# Altium PCB lora.PcbDoc
Units mil, origin at the board's own origin, x right, y up, seen from the top; angles counter-clockwise.
Board outline 1910 x 1940 mil, 2 copper layers (Top Layer, Bottom Layer); 42 components, 31 nets, 141 pads, 4 vias.
Unrouted connection lines stored in the file: 73.
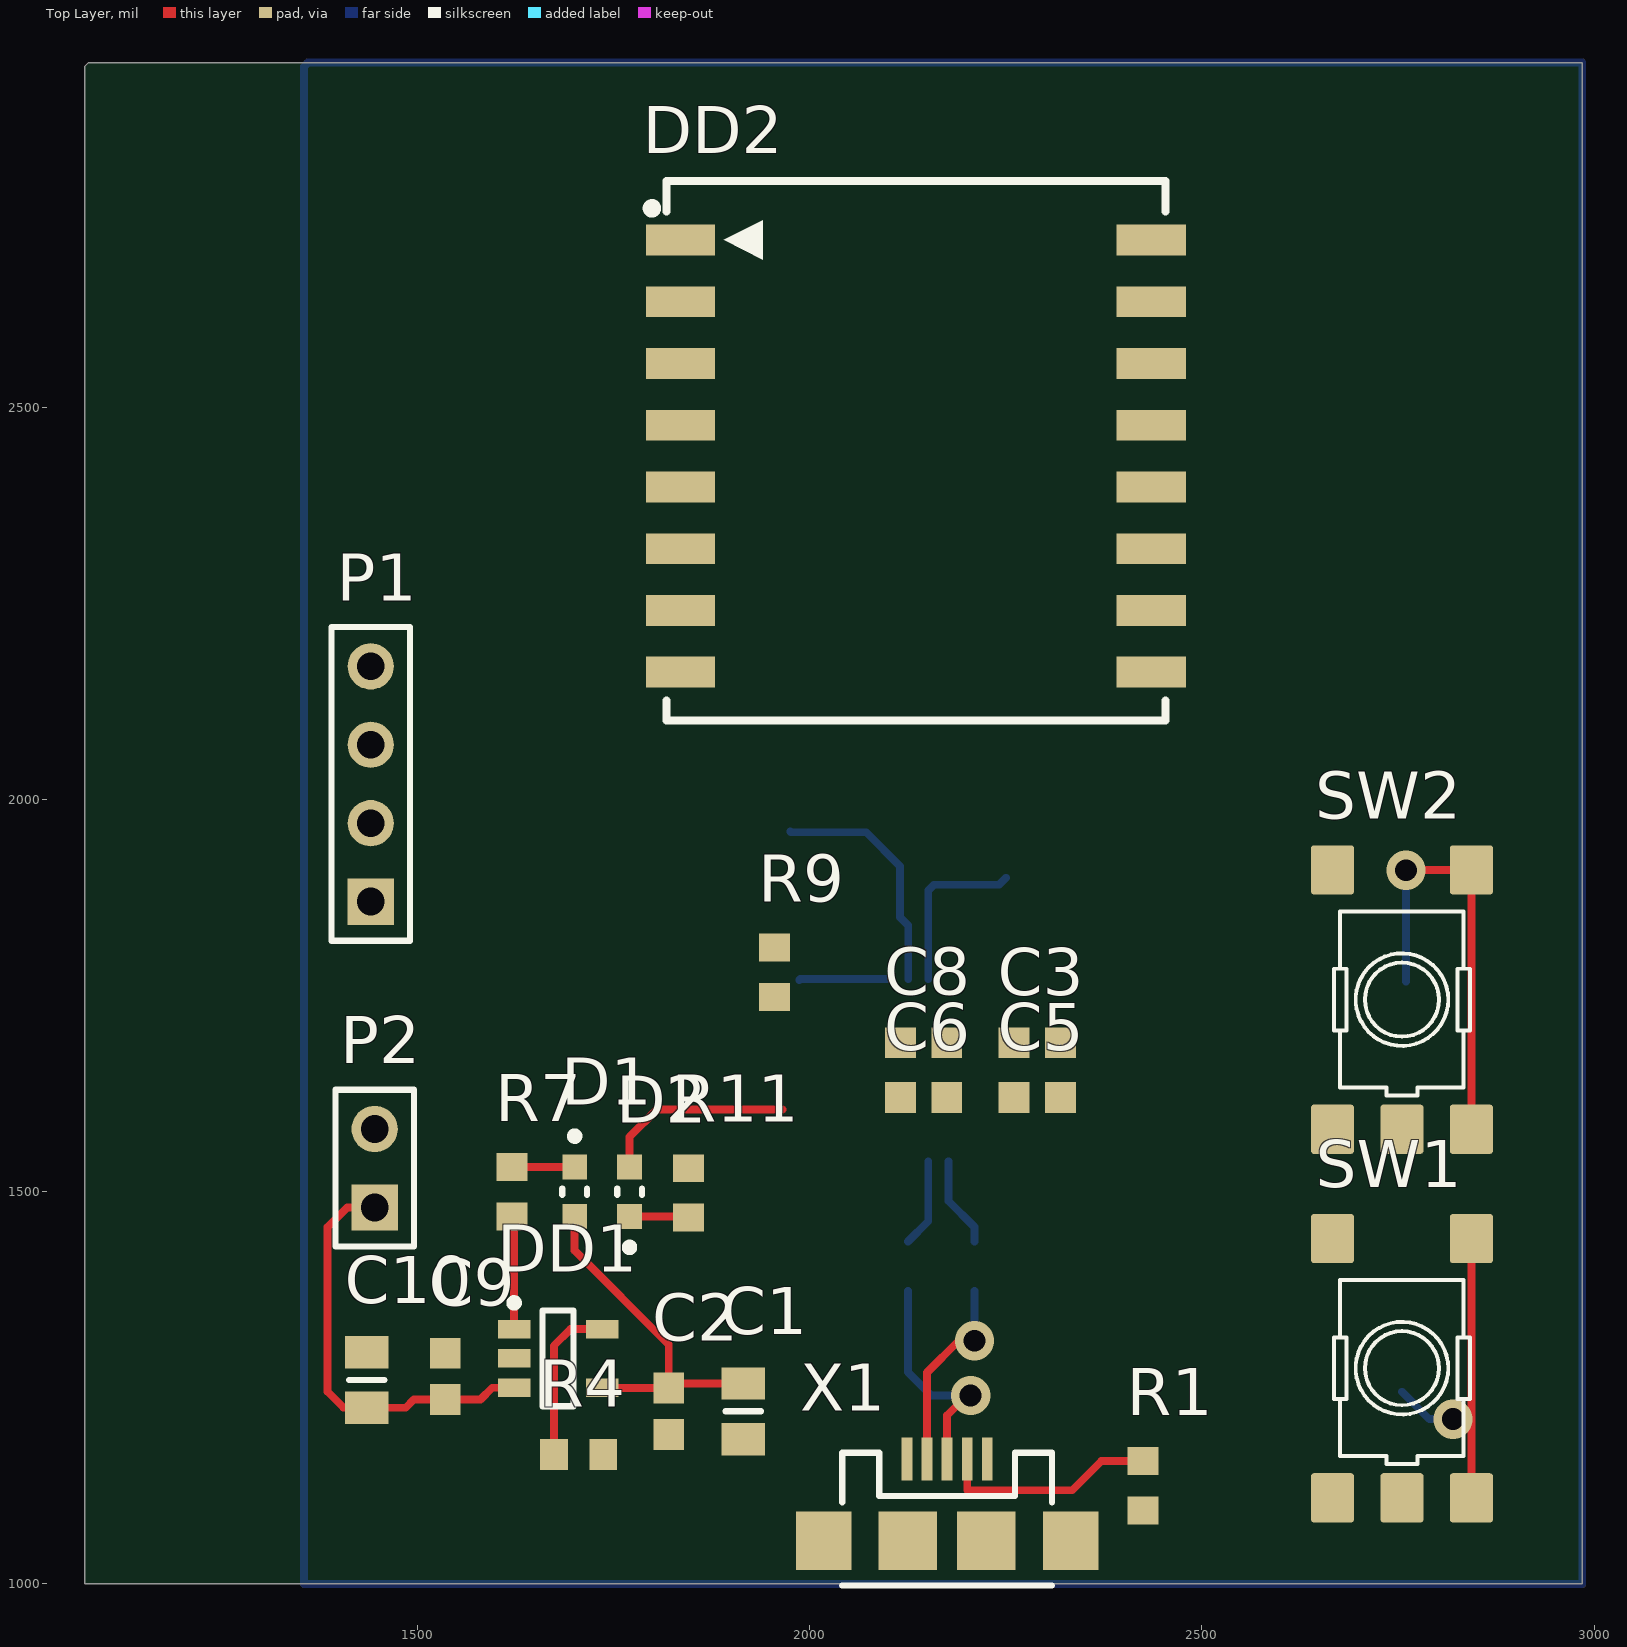
[diagram p0: Top Layer view]
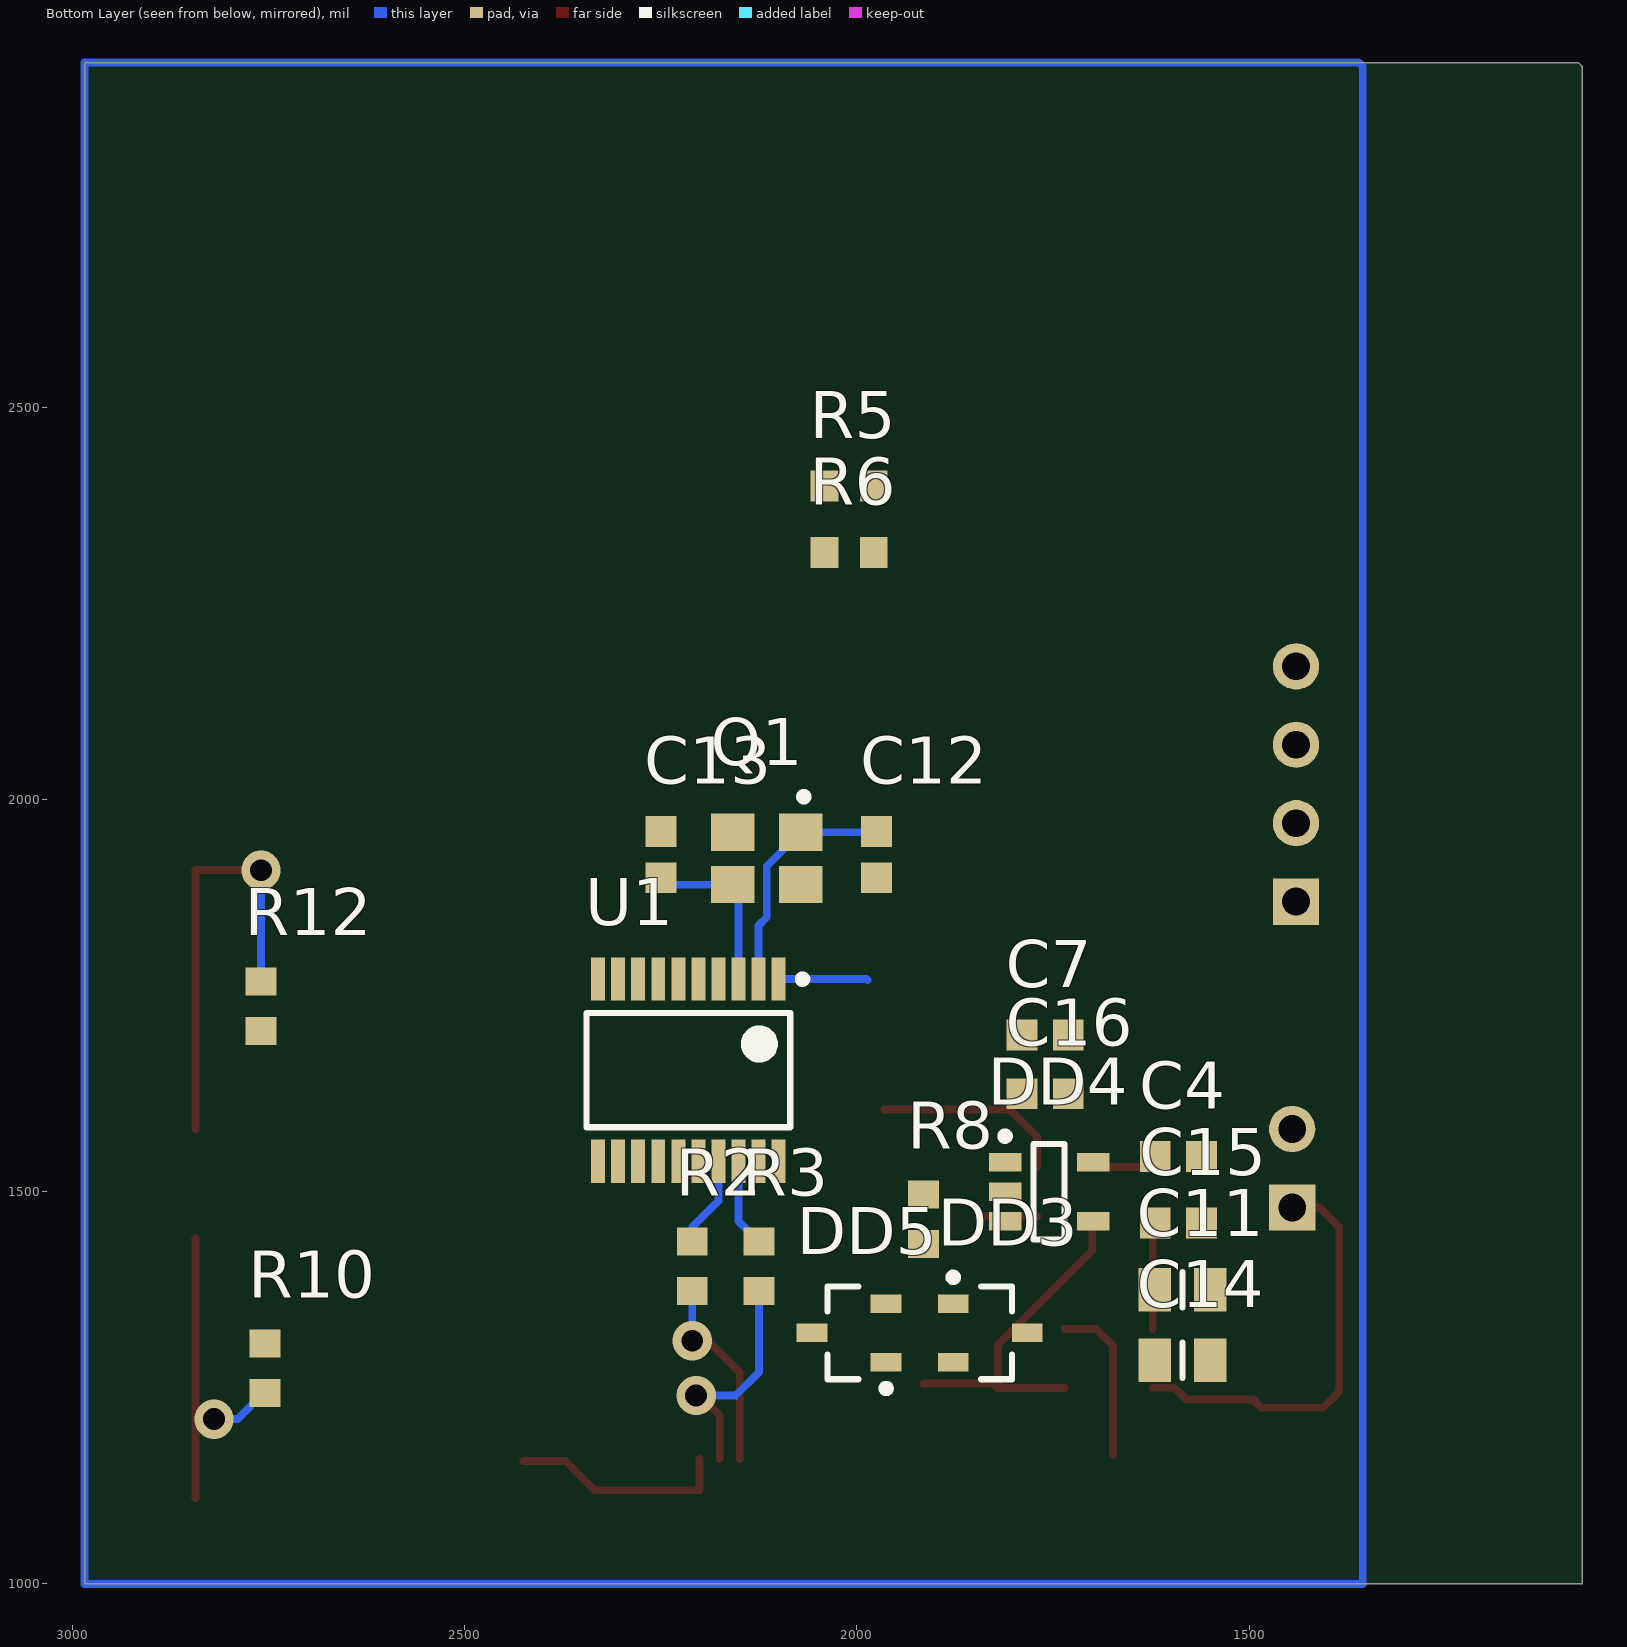
[diagram p1: Bottom Layer view, seen from below]

## Layer stack, top to bottom
Top Solder: solder mask 0.4, Solder Resist, Dk 3.5
Top Layer: signal copper 1.4
Dielectric 1: dielectric 12.6, FR-4, Dk 4.8
Bottom Layer: signal copper 1.4
Bottom Solder: solder mask 0.4, Solder Resist, Dk 3.5

## Board outline
1075,1000 1075,2935 1080,2940 2985,2940 2985,1000

## Design rules (kind name [scope] priority, off if disabled: settings)
Clearance [All] p1: gap=10 ignorepadtopadclearanceinfootprint=FALSE except(0: Arc-Hole Track-Hole SMDPad-Hole THPad-Hole Via-Hole Fill-Hole Poly-Hole Region-Hole Text-Hole; 6: Arc-Arc Arc-Track Arc-SMDPad Arc-THPad Arc-Via Arc-Fill Arc-Poly Arc-Region Arc-Text Track-Track Track-SMDPad Track-THPad Track-Via Track-Fill Track-Poly Track-Region Track-Text)
PolygonConnect [All] p1: connectstyle=Relief reliefconductorwidth=10 reliefentries=4 polygonreliefangle="90 Angle" airgapwidth=10
RoomDefinition stm32-lora [InComponentClass('stm32-lora')] p1: confinementstyle=ConfineIn formatcopy=TRUE lockcomponents=FALSE outline 240,600 9168.9,600 9168.9,5615 240,5615
RoutingVias [All] p1: holewidth=28 width=50 viastyle="Through Hole" minholewidth=28 minwidth=50 maxholewidth=28 maxwidth=50
SolderMaskExpansion [All] p1: expansion=4
Width [All] p1: maxlimit=100 minlimit=6 preferedwidth=10
30 further rules are at their usual default settings.

## Components (designator, comment, footprint, x,y, rotation, side; value= is the part's Value field where it differs from the comment)
C1 "=Value" CAPC2012X135N 1915,1220 r90 top
C2 "=Value" CAPC1608X85N 1820,1220 r90 top
C3 "=Value" CAPC1608X85N 2290,1690 r0 top
C4 "=Value" CAPC1608X85N 1590,1545 r0 bottom
C5 "=Value" CAPC1608X85N 2290,1620 r0 top
C6 "=Value" CAPC1608X85N 2145,1620 r180 top
C7 "=Value" CAPC1608X85N 1760,1700 r180 bottom
C8 "=Value" CAPC1608X85N 2145,1690 r180 top
C9 "=Value" CAPC1608X85N 1535,1264.53 r270 top
C10 "=Value" CAPC2012X135N 1435,1260 r270 top
C11 "=Value" CAPC2012X135N 1585,1375 r0 bottom
C12 "=Value" CAPC1608X85N 1975,1930 r270 bottom
C13 "=Value" CAPC1608X85N 2250,1930 r270 bottom
C14 "=Value" CAPC2012X135N 1585,1285 r0 bottom
C15 "=Value" CAPC1608X85N 1590,1460 r0 bottom
C16 "=Value" CAPC1608X85N 1760,1625 r180 bottom
D1 "Green" LED_OSRAM_LGL29K 1700,1500 r270 top
D2 "Green" LED_OSRAM_LGL29K 1770,1500 r90 top
DD1 "MCP73831T" SOT95P270X145-5N 1678.9,1287.4 r0 top
DD2 "RA-02" "ESP_12 - duplicate" 1820.24,2713.74 r0 top
DD3 "IRLML6302" SOT95P245X110-3N 1830,1320 r180 bottom
DD4 "MCP73831T" SOT95P270X145-5N 1755,1500 r180 bottom
DD5 "BAT54C" SOT95P245X110-3N 2010,1320 r0 bottom
P1 "Header 4" HDR1X4 1440,1870 r90 top
P2 "Header 2" HDR1X2 1445,1480 r90 top
Q1 "114.285MHZ" XTAL_CONNOR_CS 2115,1925 r270 bottom
R1 "100k" RESC1608X55N 2425,1125 r270 top
R2 "100k" RESC1608X55N 2210,1405 r90 bottom
R3 "100k" RESC1608X55N 2125,1405 r90 bottom
R4 "100k" RESC1608X55N 1705,1165 r180 top
R5 "100k" RESC1608X55N 2010,2400 r0 bottom
R6 "100k" RESC1608X55N 2010,2315 r0 bottom
R7 "1k" RESC1608X55N 1620,1500 r90 top
R8 "1k" RESC1608X55N 1915,1465 r90 bottom
R9 "10k" RESC1608X55N 1955,1780 r270 top
R10 "10k" RESC1608X55N 2755,1275 r270 bottom
R11 "1k" RESC1608X55N 1845,1498.5 r270 top
R12 "10k" RESC1608X55N 2760,1736.5 r90 bottom
SW1 "TS42 Dongnan Electronics Tact switch VDC 12V - 50mA" TS42 2755,1275 r90 top
SW2 "TS42 Dongnan Electronics Tact switch VDC 12V - 50mA" TS42 2755,1745 r90 top
U1 "STM32F070" SOP127P600-8N 2215,1655 r270 bottom
X1 "uUSB" USB-MICROB 2175,1055 r0 top

## Footprints (in the part's own frame and the unit in brackets; to place one, negate y for a bottom-side part, rotate by r counter-clockwise, add the part's x,y. Pads: shape width x height; smd on the part's side, far side on the other; paste and mask are expansions set on the pad)
CAPC1608X85N [mm] "Chip Capacitor, Body 1.6x0.8mm IPC Medium Density"
  rect 1x1 smd: 1(-0.75,0) 2(0.75,0)
  body extent -0.87,-0.47 0.88,0.48, height 0.85
CAPC2012X135N [mm] "Chip Capacitor, Body 2.0x1.25mm, IPC Medium Density"
  rect 1.05x1.4 smd: 1(-0.9,0) 2(0.9,0)
  silkscreen extent 0,-0.58 0,0.58, body extent -1.05,-0.67 1.05,0.68, height 1.25
"ESP_12 - duplicate" [mm] "ESP-12 Wi-Fi Module by AI-Thinker"
  rect 2.25x1 smd: 1(0.375,0) 2(0.375,-2) 3(0.375,-4) 4(0.375,-6) 5(0.375,-8) 6(0.375,-10) 7(0.375,-12) 8(0.375,-14) 9(15.625,-14) 10(15.625,-12) 11(15.625,-10) 12(15.625,-8) 13(15.625,-6) 14(15.625,-4) 15(15.625,-2) 16(15.625,0)
  silkscreen extent -0.7,-15.57 16.08,1.91
HDR1X2 [mm] "Connector; Header; 2 Position"
  rect 1.5x1.5 hole 0.9: 1(0,0)
  round 1.5 hole 0.9: 2(2.54,0)
  silkscreen extent -1.27,-1.27 3.81,1.27
HDR1X4 [mm] "Connector; Header; 4 Position"
  rect 1.5x1.5 hole 0.9: 1(0,0)
  round 1.5 hole 0.9: 2(2.54,0) 3(5.08,0) 4(7.62,0)
  silkscreen extent -1.27,-1.27 8.89,1.27
LED_OSRAM_LGL29K [mm] "Green Chip LED, 2-Leads, Body 1.7x0.8mm, IPC Medium Density"
  rect 0.8x0.8 smd: 1(-0.8,0) 2(0.8,0)
  silkscreen extent -1.92,-0.4 0.1,0.4, body extent -0.85,-0.4 0.85,0.4, height 0.67
RESC1608X55N [mm] "Chip Resistor, EIA 0603, Metric 1608, Body 1.6x0.8mm, IPC Medium Density"
  rect 0.9x1 smd: 1(-0.8,0) 2(0.8,0)
  body extent -0.87,-0.47 0.88,0.48, height 0.55
SOP127P600-8N [mm]
  rect 1.4x0.45 smd: 1(-2.95,2.925) 2(-2.95,2.275) 3(-2.95,1.625) 4(-2.95,0.975) 5(-2.95,0.325) 6(-2.95,-0.325) 7(-2.95,-0.975) 8(-2.95,-1.625) 9(-2.95,-2.275) 10(-2.95,-2.925) 11(2.95,-2.925) 12(2.95,-2.275) 13(2.95,-1.625) 14(2.95,-0.975) 15(2.95,-0.325) 16(2.95,0.325) 17(2.95,0.975) 18(2.95,1.625) 19(2.95,2.275) 20(2.95,2.925)
  silkscreen extent -3.07,-3.3 1.85,3.82, body extent -3.2,-3.3 3.2,3.3, height 1.2
SOT95P245X110-3N [mm] "SOT23, 3-Leads, Body 2,90x2,45mm, Pitch 0,95mm, IPC Medium Density"
  rect 1x0.6 smd: 1(-1.2,0.95) 2(-1.2,-0.95) 3(1.2,0)
  silkscreen extent -1.33,-1.5 0.7,1.92, body extent -0.7,-1.5 0.7,1.5, height 1.1
SOT95P270X145-5N [mm] "SOT23, 5-Leads, Body 2,90x2,70mm, Pitch 0,95mm, IPC Medium Density"
  rect 1.05x0.6 smd: 1(-1.425,0.95) 2(-1.425,0) 3(-1.425,-0.95) 4(1.425,-0.95) 5(1.425,0.95)
  silkscreen extent -1.55,-1.55 0.5,1.92, body extent -0.9,-1.55 0.9,1.55, height 1.45
TS42 [mil]
  rrect15% 62.99x55.12 smd: 1(-165.35,88.58) 2(165.35,88.58) 3(-165.35,-88.58) 4(165.35,-88.58) 5(-165.35,0)
  silkscreen extent -122,-87 112,87
USB-MICROB [mm]
  rect 0.35x1.4 smd: 1(-1.3,2.65) 2(-0.65,2.65) 3(0,2.65) 4(0.65,2.65) 5(1.3,2.65)
  rect 1.8x1.9 smd: MT1(-4,0) MT2(4,0)
  rect 1.9x1.9 smd: P$1(-1.27,0) P$2(1.27,0)
  silkscreen extent -3.4,-1.45 3.4,2.85
XTAL_CONNOR_CS [mm] "4 Pins, 2.5x3.2mm, SMD Sealing Crystal, CS Serie"
  rect 1.2x1.4 smd: 1(-0.85,1.1) 2(-0.85,-1.1) 3(0.85,-1.1) 4(0.85,1.1)
  silkscreen extent -2.12,1.07 -1.88,1.32, body extent -1.25,-1.6 1.25,1.6, height 0.8

## Part data
C1 C10 C11 C14: library part CC0805_1NF_50V_5%_X7R, "Non-polarised capacitor", Part Number=CC0805_1NF_50V_5%_X7R
C2 C3 C4 C5 C6 C7 C8 C9 C12 C13 C15 C16: library part CPPS0603_2.2NF_16V_5%_PANASONIC_ECHU(X), "Non-polarised capacitor", Part Number=CPPS0603_2.2NF_16V_5%_PANASONIC_ECHU(X)
D1 D2: library part "LED_OSRAM_LG L29K-G2J1-24-Z", "LED Green 1C 2A", Case=0603, Manufacturer=OSRAM, Manufacturer Part Number="LG L29K-G2J1-24-Z", Author="CERN DEM JLC", Color=Green, ComponentHeight=0.67mm, Component Type=Standard, CreateDate=24.04.2012, HelpURL=\\cern.ch\dfs\Applications\Altium\Datasheets\LED_OSRAM_LGL29K.pdf, LatestRevisionDate=24.04.2012, Mounted=Yes, PackageDescription="Green Chip LED, 2-Leads, Body 1.7x0.8mm, IPC Medium Density", Part Description="Surface Mount Green LED (0603 Case)", Part Number="LED_OSRAM_LG L29K-G2J1-24-Z", Pin Count=2, SMD=Yes, Socket=No, Table="LEDs & Displays"
DD1: "MCP73831T Li-ion/Li-po charger", Manufacter=Microchip, Part Number="MCP73831/2  SOT-23-5"
DD4: library part MIC5504, "MCP73831T Li-ion/Li-po charger", Manufacter=Microchip, Part Number="MCP73831/2  SOT-23-5"
P1: "Header, 4-Pin", LatestRevisionDate=17-Jul-2002, LatestRevisionNote="Re-released for DXP Platform.", Publisher="Altium Limited"
P2: "Header, 2-Pin", LatestRevisionDate=17-Jul-2002, LatestRevisionNote="Re-released for DXP Platform.", Publisher="Altium Limited"
Q1: library part XTAL_114.285MHZ_CONNOR_CS-018, "Crystal 4 pins 1=XTAL Control 2=GND3=XTAL 4=GND", Manufacturer="CONNOR WINFIELD", Manufacturer Part Number=CS-018-114.285M, Author="CERN DEM JLC", ComponentHeight=0.8mm, Component Type=Standard, CreateDate=16.04.2013, HelpURL=\\cern.ch\dfs\Applications\Altium\Datasheets\XTAL_CONNOR_CS-018.pdf, LatestRevisionDate=08.07.2014, Mounted=Yes, PackageDescription="4 Pins, 2.5x3.2mm, SMD Sealing Crystal, CS Serie", Part Description="±100ppm 18pF -40°C to +85°C  4 Pins, 3.2x2.5X0.8mm, SMD Crystal Unit, CS-018 Serie", Part Number=XTAL_114.285MHZ_CONNOR_CS-018, Pin Count=4, SMD=Yes, Socket=No, Table="Crystals & Oscillators"
R1 R2 R3 R4 R5 R6: library part R0603_2K7_1%_0.1W_100PPM, "Resistor - 1%", Part Number=R0603_2K7_1%_0.1W_100PPM
R7 R8 R9 R10 R11 R12: library part R0603_2K7_1%_0.1W_100PPM, "Resistor - 1%", Case=0603, Manufacturer=GENERIC, Manufacturer1 ComponentHeight=0.55mm, Manufacturer1 Example="YAGEO PHYCOMP", Manufacturer1 Part Number=RC0603FR-072K7L, Power=0.1W, Tolerance=±1%, Author="CERN DEM JLC", Component Type=Standard, CreateDate=02.05.2011, HelpURL=\\cern.ch\dfs\Applications\Altium\Datasheets\R0603_PHYCOMP_RC0603.pdf, LatestRevisionDate=02.05.2011, Manufacturer Part Number=R0603_2K7_1%_0.1W_100PPM, Mounted=Yes, Part Description="General Purpose Thick Film Chip Resistor", Part Number=R0603_2K7_1%_0.1W_100PPM, Pin Count=2, SMD=Yes, Socket=No, Status=Preferred, Table="Resistors SMD", TC=±100ppm/°C
SW1 SW2: library part TS42
U1: library part STM32F070F4P6, "ARM Cortex-M0 32-bit MCU, 32 KB Flash, 4 KB Internal RAM, 15 I/Os, 20-pin TSSOP, -40 to 85 degC, Tube", I/Os (High Current)=15, Operating Frequency(F) (Processor speed) (MHz)=48, PartNumber=STM32F050F6P6, Supplier Part Number 1=STM32F050F6P6-ND, Supply Voltage(Vcc) min (V)=2, ComponentLink1Description="Manufacturer URL", ComponentLink1URL=http://www.st.com/web/en/home.html, ComponentLink2Description=Datasheet, ComponentLink2URL=http://www.st.com/st-web-ui/static/active/en/resource/technical/document/datasheet/DM00065136.pdf, ComponentLink3Description="Package Specification", ComponentLink3URL=http://www.st.com/st-web-ui/static/active/en/resource/technical/document/datasheet/DM00065136.pdf, Core="ARM Cortex-M0", DatasheetVersion="Rev. 1", FLASH Size (Prog) (kB)=32, Internal RAM Size (kB)=4, Mounting Technology="Surface Mount", PackageDescription="20-Pin Thin Shrink Small Outline Package, 6.5 x 4.4 mm Body, 0.65 mm Pitch", PackageReference=TSSOP20, PackageVersion="Rev. 1, 11/2012", Packing=Tube, Supplier 1=Digi-Key, Supplier 2=Farnell, Supplier 3=Newark, Supplier 4=Newark, Supplier 5=Mouser, Supplier 6=Farnell, Supplier Part Number 2=2333136, Supplier Part Number 3=99W9749, Supplier Part Number 4=89W1489, Supplier Part Number 5=511-STM32F050F6P6, Supplier Part Number 6=2488284
X1: library part usb, "micro USB"

## Via types
v1: diameter 50, hole 28, Top Layer to Bottom Layer, 4 vias

## Nets (pads, with @x,y where several pads share a name; then routed paths per layer and width w, separated by ;. In a path a pad name is that pad's centre, name@x,y a point inside that pad or via, vN(x,y) a via of type N, cw(c..) or ccw(c..) an arc to the next point about the centre after c; other vN are vias at no path point)
3.3V: C3.2 C4.2 C5.2 C6.2 C7.2 C8.2 C16.2 DD2.3 DD4.5 P1.1 R10.1 R12.1 U1.5 U1.16
DIO0: DD2.5 R5.1
DIO1: DD2.6 R6.1
GND: C1.1 C2.1 C3.1 C4.1 C5.1 C6.1 C7.1 C8.1 C9.1 C10.1 C11.1 C12.2 C13.1 C14.1 C15.1 C16.1 DD1.2 DD2.1 DD2.2 DD2.9 DD2.16 DD4.2 P1.4 P2.2 Q1.2 Q1.4 R1.2 R4.1 R8.2 R9.1 R11.1 SW1.1 SW2.1 U1.15 X1.5
LED1: D2.2 U1.14 | length 248
  Top Layer w10: D2.2 1770,1570 1805,1605 1965,1605
NetC9_2: C9.2 C10.2 DD1.3 DD3.3 P2.1 | length 537.1
  Top Layer w10: P2.1 1410,1480 1385,1455 1385,1245 1405.43,1224.57 C10.2 1484.57,1224.57 1495,1235 C9.2 1580,1235 1595,1250 DD1.3
NetC11_2: C11.2 C14.2 C15.2 DD3.2 DD4.4 DD5.3
NetC12_1: C12.1 Q1.1 U1.2 | length 306.7
  Bottom Layer w10: C12.1 1976.06,1958.46 Q1.1 2115,1915.16 2115,1850 2125.43,1839.57 U1.2
NetC13_2: C13.2 Q1.3 U1.3 | length 218.8
  Bottom Layer w10: U1.3 2151.02,1884.25 Q1.3 2241.06,1891.54 C13.2
NetD1_1: D1.1 R7.2 | length 80
  Top Layer w10: R7.2 D1.1
NetD2_1: D2.1 R11.2 | length 75.6
  Top Layer w10: D2.1 1843.5,1468.5 R11.2
NetDD1_1: DD1.1 R7.1 | length 144.9
  Top Layer w10: R7.1 1622.8,1465.71 DD1.1
NetDD1_5: DD1.5 R4.2 | length 208.8
  Top Layer w10: R4.2 1673.5,1303.5 1694.8,1324.8 DD1.5
NetR1_1: R1.1 X1.4 | length 279.7
  Top Layer w10: X1.4 2200.59,1119.41 2334.41,1119.41 2371.5,1156.5 R1.1
NetR2_1: R2.1 X1.2 | length 251
  Top Layer w10: X1.2 2149.41,1269.41 2190,1310 v1(2210,1310)
  Bottom Layer w10: v1(2210,1310) R2.1
NetR3_1: R3.1 X1.3 | length 292
  Top Layer w10: X1.3 2175,1215 2200,1240 v1(2205,1240)
  Bottom Layer w10: R3.1 2125,1270 2155,1240 v1(2205,1240)
NetR5_2: R5.2 U1.8
NetR6_2: R6.2 U1.9
NetR9_2: R9.2 U1.1 | length 113.8
  Bottom Layer w10: 1986.5,1770 1987.64,1771.14 U1.1
RST: DD2.4 U1.7
SPI_MISO: DD2.12 U1.12
SPI_MOSI: DD2.15 U1.13
SPI_SCK: DD2.14 U1.11
SPI_SS: DD2.13 U1.10
SRST: R10.2 SW1.3 SW1.4 U1.4 | length 410.2
  Top Layer w10: SW1.3 SW1.4
  Bottom Layer w10: R10.2@2755,1245 2790,1210 v1(2820,1210)
SW1: R12.2 SW2.3 SW2.4 U1.6 | length 556.4
  Top Layer w10: v1(2760,1910) 2760.35,1910.35 SW2.4 SW2.3
  Bottom Layer w10: R12.2 v1(2760,1910)
SWCLK: P1.3 U1.20
SWDIO: P1.2 U1.19
USB_DM: R2.2 U1.17 | length 116.2
  Bottom Layer w10: U1.17 2176.61,1488.39 2210,1455 R2.2
USB_DP: R3.2 U1.18 | length 113.1
  Bottom Layer w10: R3.2 2151.02,1462.52 U1.18
VUSB: C1.2 C2.2 D1.2 DD1.4 DD3.1 DD5.1 DD5.2 R8.1 X1.1 | length 451.3
  Top Layer w10: D1.2 1700,1425 1820,1305 C2.2 ; DD1.4 1735.47,1249.53 C2.2 ; C1.2 1825.91,1255.43 C2.2
pads on no net: DD2.7 DD2.8 DD2.10 DD2.11 DD4.1 DD4.3 SW1.2 SW1.5 SW2.2 SW2.5 X1.MT1 X1.MT2 X1.P$1 X1.P$2
copper on no net: | length 7137.1
  Bottom Layer w10: 1355,1000 1355,2935 1360,2940 2985,2940 2985,1000 1355,1000